# EAGLE board blinkmusb_p3 (EAGLE 5.11)
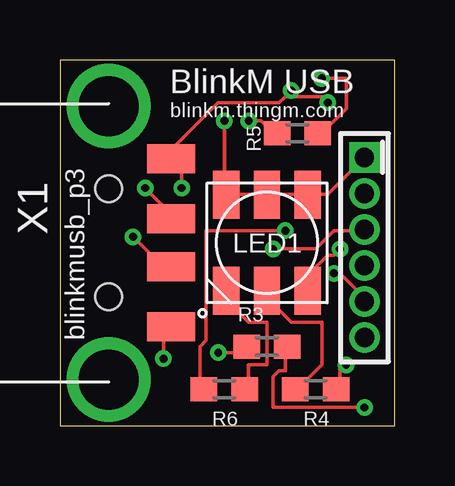
[diagram p0: board, top side]
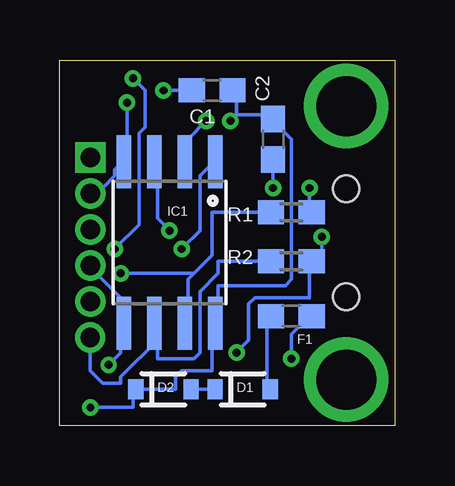
[diagram p1: board, bottom side, seen from below]

Size 13.97 x 15.24 mm. Coordinates in mm from the lower left corner, seen from the top.
Outline: 0,0 13.97,0 13.97,15.24 0,15.24 0,0
Copper layers (1*16): Top 0.0356mm / dielectric 1.5011mm / Bottom 0.0356mm
Design rules "LaenPCBOrder": minimum track width 6mil, minimum drill 13mil, track to track 6mil, track to pad 6mil, pad to pad 6mil, via to via 6mil, smd to smd 6mil, copper to edge 15mil, drill to drill 6mil, minimum pad ring 7mil, minimum via ring 7mil, stop-mask expansion 4mil, vias tented up to drill 0mil, thermal gap 10mil

## Footprints (pad centres in the part's own frame; a part is rotated, then mirrored left to right if it is on the bottom)
C0603 = smd 1.1 x 1: 1 -0.85,0; 2 0.85,0
SOD-323 = smd 0.63 x 0.83: 1 -1.15,0; 2 1.15,0
0603 = smd 1.1 x 1: 1 -0.85,0; 2 0.85,0
SO08-EIAJ = smd 0.61 x 2.21: 1 -1.905,-3.378; 2 -0.635,-3.378; 3 0.635,-3.378; 4 1.905,-3.378; 5 1.905,3.353; 6 0.635,3.353; 7 -0.635,3.353; 8 -1.905,3.353
RGBLED5050 = smd 2 x 1.1: 1 -2,1.7; 2 -2,0; 3 -2,-1.7; 4 2,-1.7; 5 2,0; 6 2,1.7
R0603 = smd 1.1 x 1: 1 -0.85,0; 2 0.85,0
AVR_MINI_PROG = drill 0.8 pad 1.27 square: 1 0,0 | drill 0.8 pad 1.27 round: 2 1.5,0; 3 3,0; 4 4.5,0; 5 6,0; 6 7.5,0.01
MOLEX_480371000 = smd 1.2 x 2: 1 3.5,2.6; 2 1,2.6; 3 -1,2.6; 4 -3.5,2.6 | drill 2.5 round: M1 -5.7,0; M2 5.7,0 | hole 1.1: -2.25,0; 2.25,0

## Placement (x,y rotation side)
C1  [C0603]  7.62,13.97 180 bottom
C2  10uF  [C0603]  5.08,11.94 270 bottom
D1  [SOD-323]  6.35,1.52 0 bottom
D2  [SOD-323]  9.65,1.52 0 bottom
F1  PTC0603  [0603]  4.32,4.57 180 bottom
IC1  ATTINY45SOIC  [SO08-EIAJ]  9.4,7.62 180 bottom
LED1  RGBLED5050  [RGBLED5050]  8.64,7.62 270 top
R1  68  [R0603]  4.32,8.89 0 bottom
R2  68  [R0603]  4.32,6.86 0 bottom
R3  1k5  [R0603]  8.64,3.3 180 top
R4  100  [R0603]  10.67,1.52 180 top
R5  100  [R0603]  9.91,12.19 0 top
R6  60  [R0603]  6.86,1.52 0 top
U$1  AVR_MINI_PROGSMD  [AVR_MINI_PROG]  12.7,11.18 270 top
X1  USB-A  [MOLEX_480371000]  2.03,7.62 270 top

## Library data of the parts
C1 C2 R1-R6 = rcl
D1 D2 F1 U$1 = SparkFun-20110517
IC1 = todstuff
LED1 X1 = adafruit-20120122

## Nets
BLU: IC1.3 R6.1
D+: IC1.7 R1.1 U$1.5
D-: IC1.6 R2.1 U$1.6
GND: C1.2 C2.2 IC1.4 U$1.2 X1.4
GRN: IC1.2 R5.1
N$1: D1.2 F1.2
N$4: R1.2 X1.3
N$5: R2.2 R3.2 X1.2
N$12: D1.1 D2.2
N$13: F1.1 X1.1
RBLU: LED1.4 R6.2
RED: IC1.5 R4.1 U$1.4
RGRN: LED1.6 R5.2
RRED: LED1.5 R4.2
RST: IC1.1 U$1.3
VCC: C1.1 C2.1 D2.1 IC1.8 LED1.1 LED1.2 LED1.3 R3.1 U$1.1

## Tracks (layer width: path | path; a pad name or v marks a point on that pad's centre or on a via)
BLU  (via drill 0.33)
  Top 0.152: v9.4,8.13 6.1,8.13 6.1,3.56 5.84,3.3 5.84,1.52 R6.1
  Bottom 0.152: v9.4,8.13 9.91,8.64 9.91,10.92 IC1.3
D+  (via drill 0.33)
  Top 0.152: v11.43,6.35 11.68,6.35 12.7,5.33 U$1.5
  Bottom 0.152: 8.38,6.35 8.64,6.1 8.64,4.32 IC1.7 | 8.38,6.35 7.62,7.11 7.62,8.89 5.33,8.89 R1.1 | 8.38,6.35 v11.43,6.35
D-
  Bottom 0.152: 9.91,3.56 9.91,4.06 IC1.6 9.91,3.56 | 9.91,3.56 9.91,2.79 8.38,2.79 8.13,3.05 8.13,5.59 7.37,6.35 7.37,6.86 5.33,6.86 R2.1 | 9.91,3.56 11.43,2.03 11.43,1.78 12.19,1.78 12.7,2.29 12.7,3.56 U$1.6
GND  (via drill 0.33)
  Top 0.152: v5.08,9.91 5.08,10.92 4.83,10.92 X1.4 4.83,11.18 4.83,11.68 6.6,13.46 9.14,13.46 9.4,13.72 | 9.4,13.72 v9.65,13.97 | v11.18,13.46 10.92,13.72 9.4,13.72
  Bottom 0.152: U$1.2 12.7,9.91 12.19,9.91 11.68,10.41 11.68,10.67 11.43,10.92 IC1.4 11.18,11.18 v11.18,13.46 | v5.08,9.91 5.08,10.92 C2.2 | v9.65,13.97 8.64,13.97 C1.2
GRN  (via drill 0.33)
  Top 0.152: v7.87,12.7 8.38,12.7 8.89,12.19 R5.1
  Bottom 0.152: v7.87,12.7 8.64,11.94 8.64,11.18 IC1.2
N$1
  Bottom 0.152: D1.2 5.33,1.52 5.33,4.57 F1.2
N$4  (via drill 0.33)
  Top 0.152: v3.56,9.91 4.83,8.64 X1.3
  Bottom 0.152: v3.56,9.91 3.56,8.89 R1.2
N$5  (via drill 0.33)
  Top 0.152: v3.05,7.87 4.06,6.86 4.57,6.86 X1.2 | v6.6,3.05 7.37,3.05 7.62,3.3 R3.2
  Bottom 0.152: v3.05,7.87 3.05,7.11 3.3,6.86 R2.2 3.56,6.86 3.56,5.33 5.84,5.33 6.1,5.08 6.1,3.56 v6.6,3.05
N$12
  Bottom 0.152: D1.1 7.62,1.52 8.38,1.52 D2.2
N$13  (via drill 0.33)
  Top 0.152: v4.32,2.79 4.32,4.06 4.57,4.06 X1.1
  Bottom 0.152: v4.32,2.79 4.32,3.81 3.56,4.57 F1.1
RBLU
  Top 0.152: R6.2 7.87,1.52 7.87,2.54 8.64,2.54 8.64,4.32 7.87,4.32 7.11,5.08 7.11,5.59 LED1.4
RED  (via drill 0.33)
  Top 0.152: v11.94,2.54 11.68,2.54 11.68,1.52 R4.1
  Bottom 0.152: v11.94,2.54 11.43,3.05 11.43,4.06 IC1.5 11.43,4.32 11.43,5.33 12.7,6.6 U$1.4
RGRN  (via drill 0.33)
  Top 0.152: v10.92,14.48 11.94,14.48 11.94,13.21 10.92,12.19 R5.2 | v11.68,7.37 11.43,7.11 11.18,7.11 10.41,6.35 10.41,5.84 LED1.6
  Bottom 0.152: v10.92,14.48 10.41,13.97 10.41,12.45 10.67,12.19 10.67,8.38 v11.68,7.37
RRED
  Top 0.152: R4.2 9.91,1.52 10.92,2.54 10.92,4.32 9.65,4.32 8.64,5.33 8.64,5.59 LED1.5
RST  (via drill 0.33)
  Top 0.152: v8.89,7.37 10.67,7.37 11.43,8.13 12.7,8.13 U$1.3
  Bottom 0.152: v8.89,7.37 8.13,8.13 8.13,10.41 7.62,10.92 IC1.1
VCC  (via drill 0.33)
  Top 0.152: 8.64,9.65 7.11,9.65 LED1.3 6.86,9.65 v6.86,12.7 | 8.64,9.65 LED1.2 8.64,9.65 | 8.64,9.65 10.16,9.65 LED1.1 10.41,9.65 11.18,9.65 U$1.1 | v12.7,0.76 8.89,0.76 8.89,2.03 9.14,2.29 9.4,2.29 9.4,3.3 R3.1
  Bottom 0.152: 6.6,12.95 5.08,12.95 C2.1 5.08,12.7 4.32,11.94 4.32,6.1 4.57,5.84 7.37,5.84 7.37,4.32 IC1.8 7.62,4.06 7.62,2.29 8.89,2.29 9.14,2.03 9.14,1.52 10.67,1.52 D2.1 10.92,1.52 10.92,0.76 v12.7,0.76 | 6.6,12.95 6.6,13.97 C1.1 | 6.6,12.95 v6.86,12.7

## Text on the board
tPlace: BlinkM USB | blinkm.thingm.com | blinkmusb_p3